# Altium PCB PCB1.PcbDoc
Units mil, origin at the board's own origin, x right, y up, seen from the top; angles counter-clockwise.
Board outline 3935 x 3930 mil, 2 copper layers (Top Layer, Bottom Layer); 150 components, 104 nets, 396 pads, 41 vias.
Unrouted connection lines stored in the file: 23.
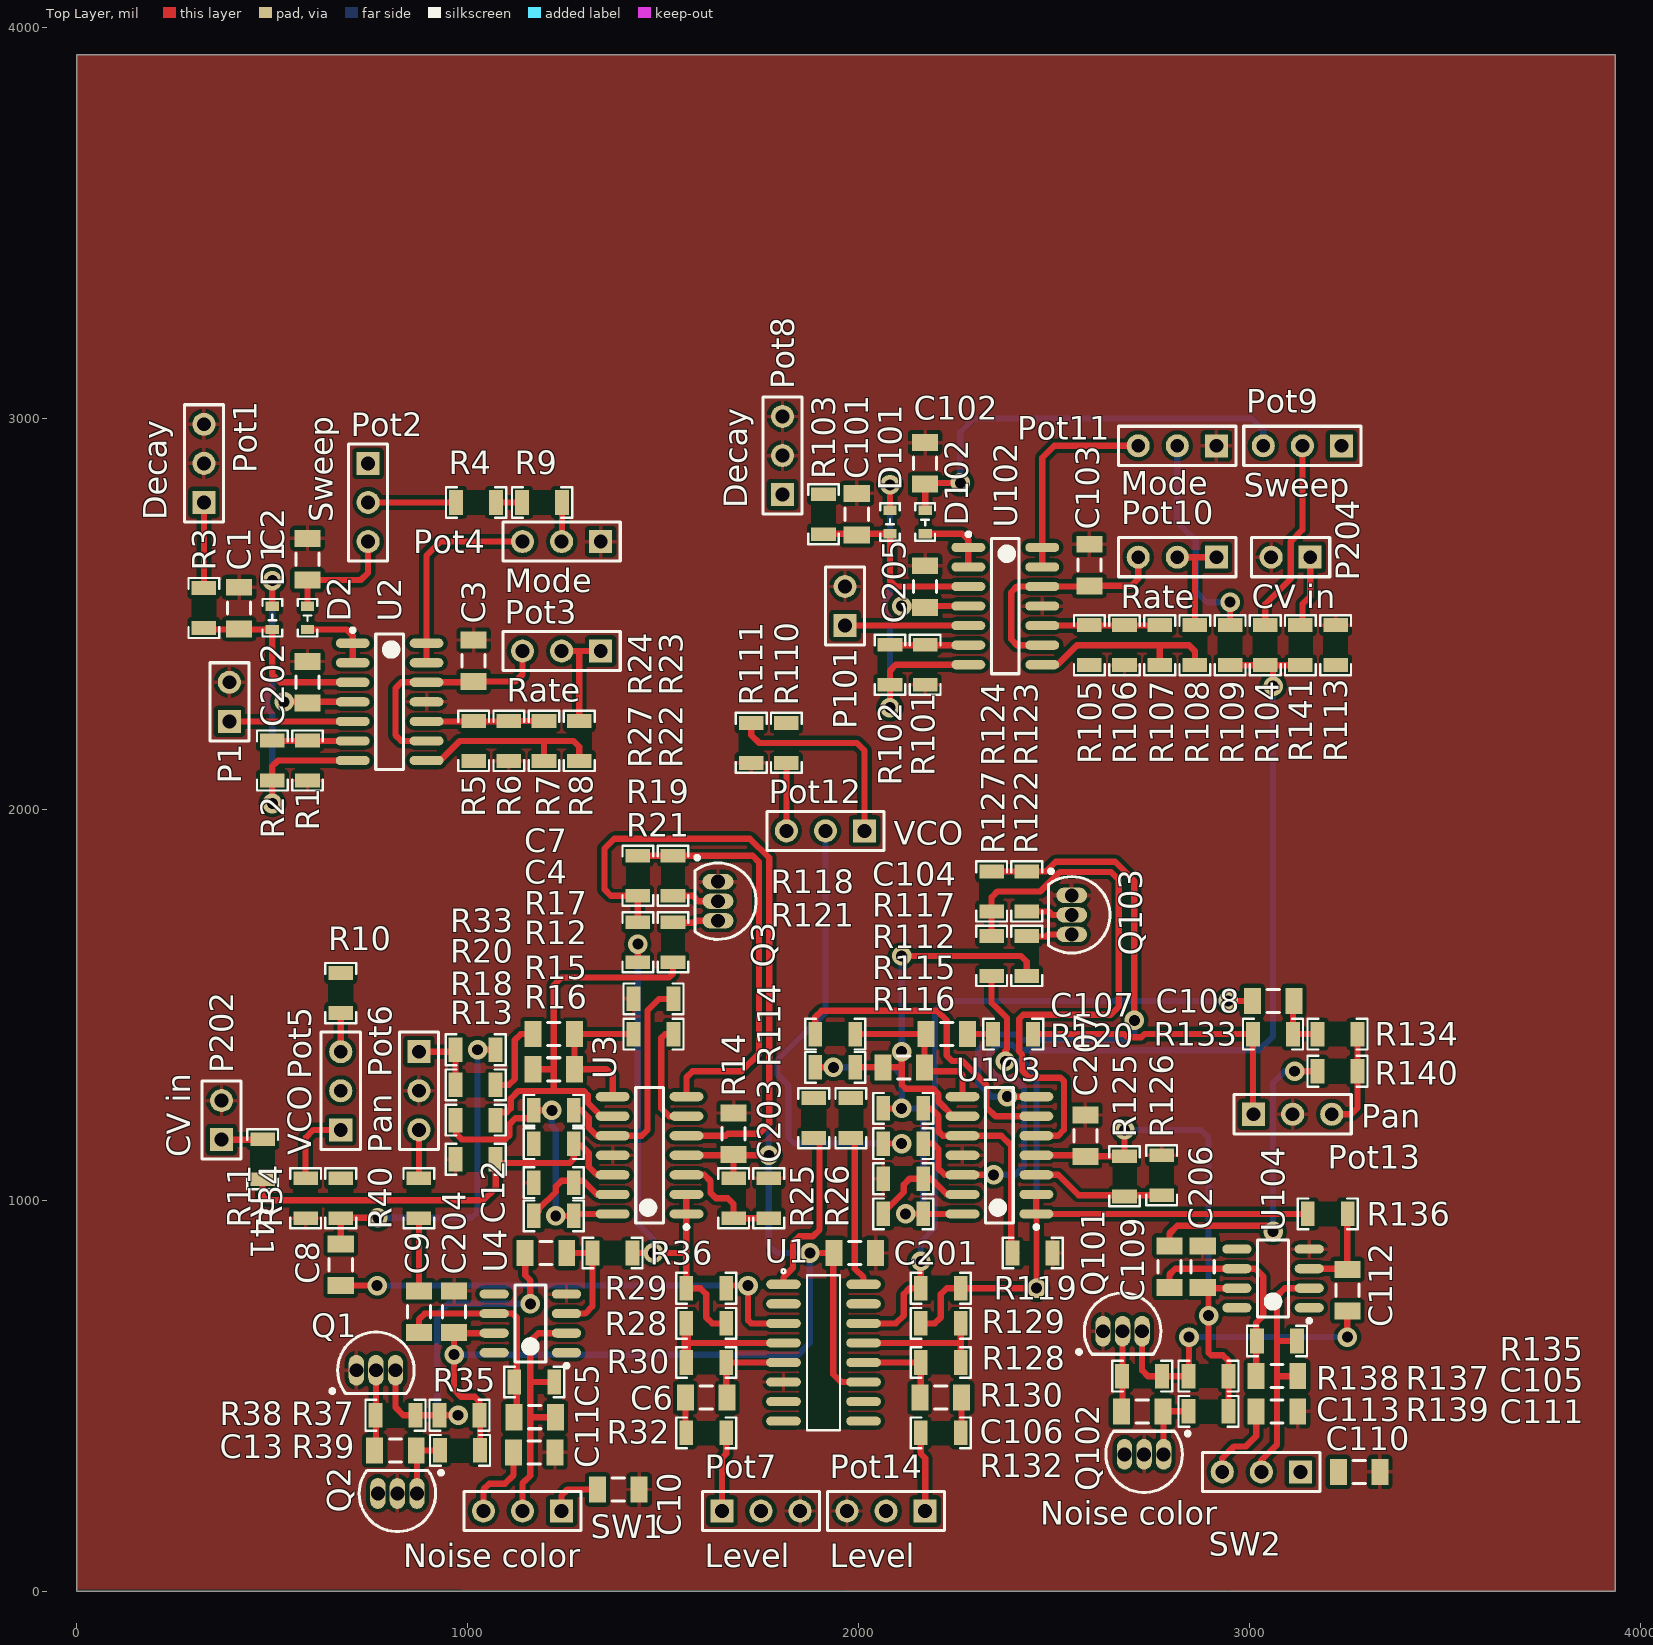
[diagram p0: Top Layer view]
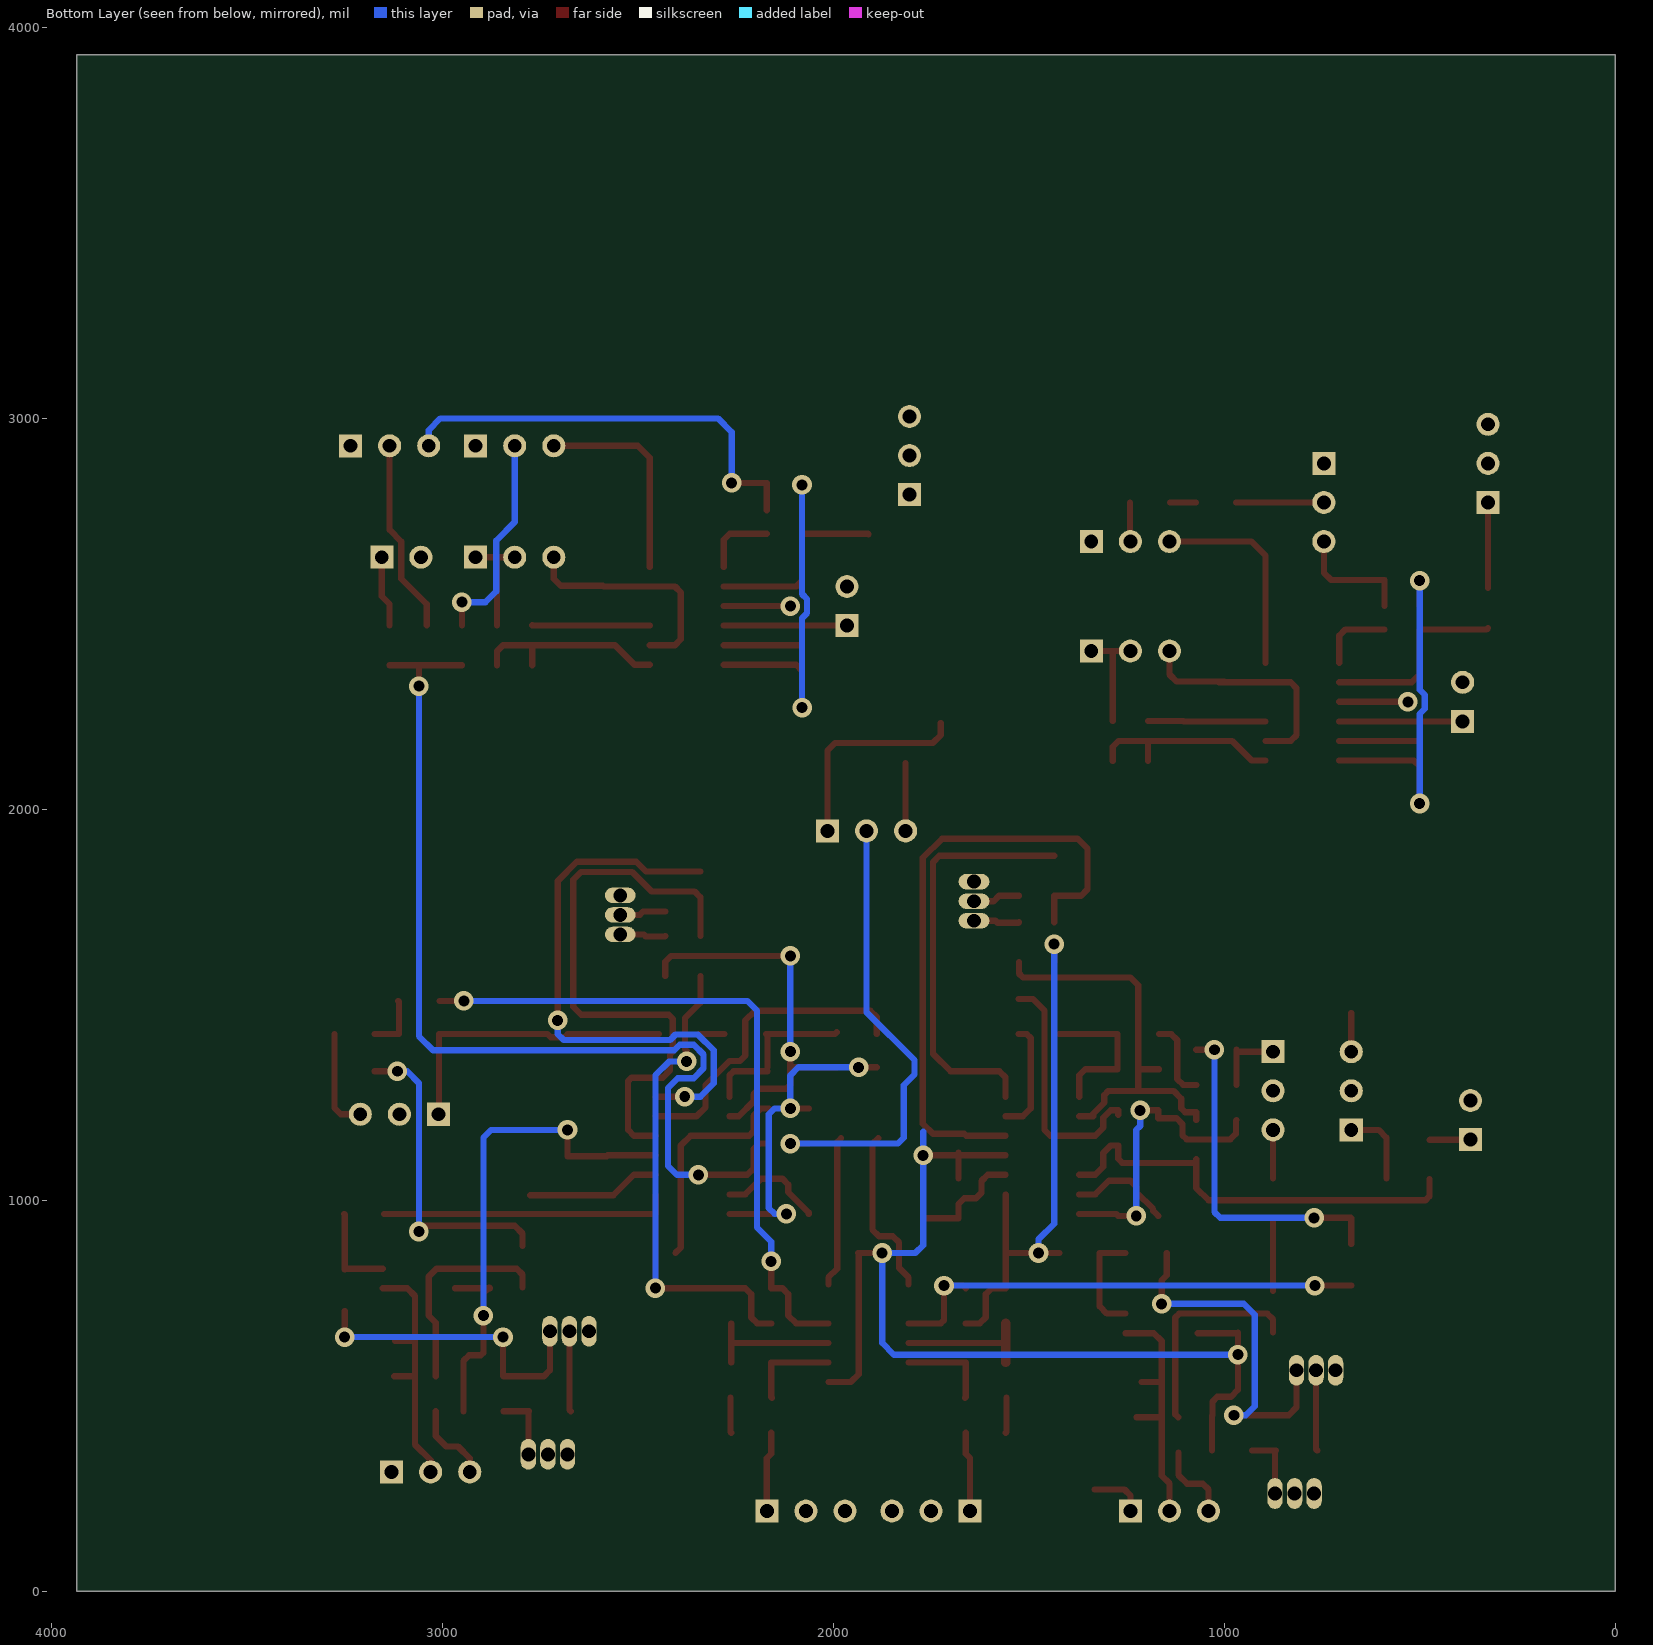
[diagram p1: Bottom Layer view, seen from below]
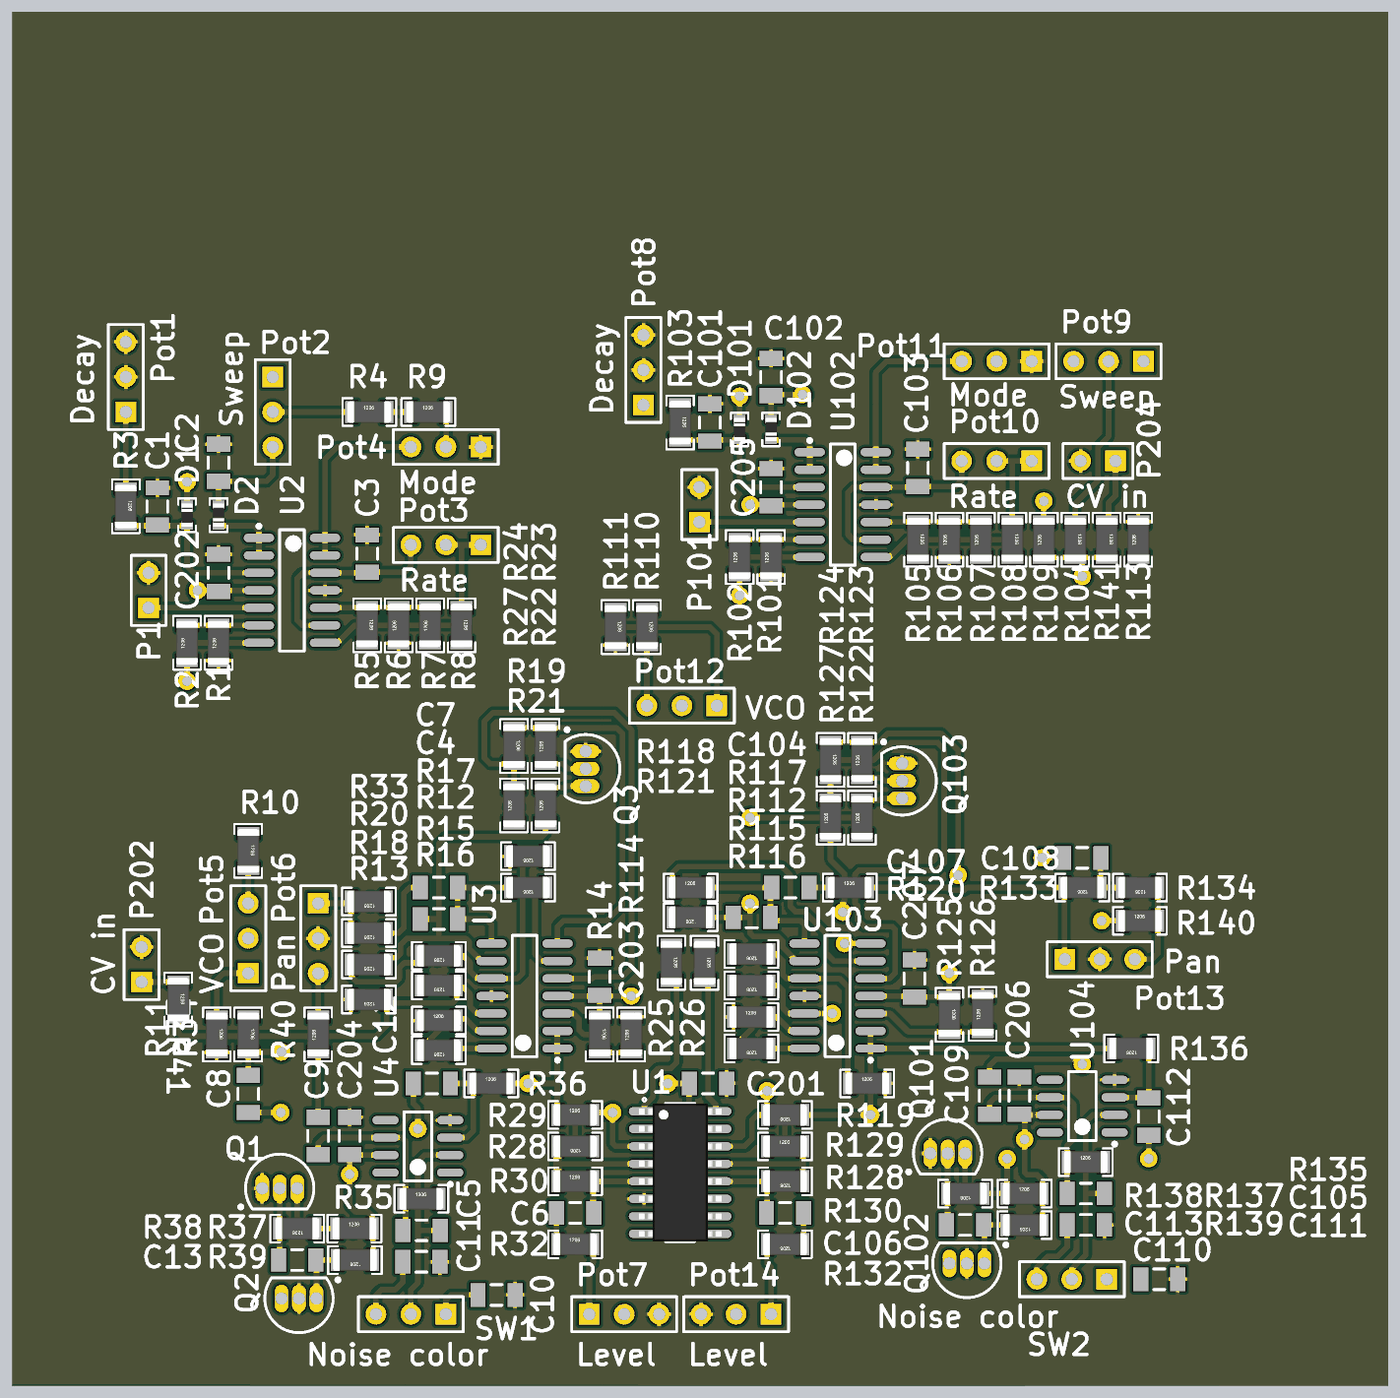
[diagram p2: 3D render of the assembled board from above, using the file's embedded part models]

## Layer stack, top to bottom
Top Solder: solder mask 0.4, Solder Resist, Dk 3.5
Top Layer: signal copper 1.4
Dielectric 1: dielectric 12.6, FR-4, Dk 4.8
Bottom Layer: signal copper 1.4
Bottom Solder: solder mask 0.4, Solder Resist, Dk 3.5

## Board outline
0,0 3935,0 3935,3930 0,3930

## Design rules (kind name [scope] priority, off if disabled: settings)
Clearance [All] p1: gap=10 ignorepadtopadclearanceinfootprint=FALSE except(0: Arc-Hole Track-Hole SMDPad-Hole THPad-Hole Via-Hole Fill-Hole Poly-Hole Region-Hole Text-Hole)
PolygonConnect [All] p1: connectstyle=Relief reliefconductorwidth=10 reliefentries=4 polygonreliefangle="90 Angle" airgapwidth=10
RoutingVias [All] p1: holewidth=28 width=50 viastyle="Through Hole" minholewidth=12 minwidth=28 maxholewidth=28 maxwidth=50
SolderMaskExpansion [All] p1: expansion=4
Width [All] p1: maxlimit=64 minlimit=10 preferedwidth=10
30 further rules are at their usual default settings.

## Classes and differential pairs
component class Sheet3: C201 C202 C203 C204 C205 C206 C207 P202 P204 Pot1 Pot2 Pot3 Pot4 Pot5 Pot6 Pot7 Pot8 Pot9 Pot10 Pot11 Pot12 Pot13 Pot14 SW1 SW2
component class Sheet2: C101 C102 C103 C104 C105 C106 C107 C108 C109 C110 C111 C112 C113 D101 D102 P101 Q101 Q102 Q103 R101 R102 R103 R104 R105 R106 R107 R108 R109 R110 R111 R112 R113 R114 R115 R116 R117 R118 R119 R120 R121 R122 R123 R124 R125 R126 R127 R128 R129 R130 R132 R133 R134 R135 R136 R137 R138 R139 R140 R141 U102 U103 U104
component class Sheet1: C1 C2 C3 C4 C5 C6 C7 C8 C9 C10 C11 C12 C13 D1 D2 P1 Q1 Q2 Q3 R1 R2 R3 R4 R5 R6 R7 R8 R9 R10 R11 R12 R13 R14 R15 R16 R17 R18 R19 R20 R21 R22 R23 R24 R25 R26 R27 R28 R29 R30 R32 R33 R34 R35 R36 R37 R38 R39 R40 R41 U1 U2 U3 U4

## Components (designator, comment, footprint, x,y, rotation, side; value= is the part's Value field where it differs from the comment)
C1 "Cap Pol1" C1206 415,2515 r90 top value="3.3 uF"
C2 "Cap Pol1" C1206 590,2640 r90 top value="3.3 uF"
C3 "Cap" C1206 1015,2380 r270 top value="47 nF"
C4 "Cap" C1206 1220,1335 r180 top value="1 nF"
C5 "Cap" C1206 1170.94,445 r0 top value="22 pF"
C6 "Cap Pol1" C1206 1610,495 r180 top value="1 uF"
C7 "Cap Pol1" C1206 1220,1425 r180 top value="1 uF"
C8 "Cap Pol1" C1206 675,835 r90 top value="1 uF"
C9 "Cap" C1206 875,715 r90 top value="47 nF"
C10 "Cap" C1206 1385,260 r0 top value="10 nF"
C11 "Cap" C1206 1170,355 r0 top value="4,7 nF"
C12 "Cap" C1206 1200,865 r180 top value="10 nF"
C13 "Cap" C1206 815,360 r180 top value="10 nF"
C101 "Cap Pol1" C1206 1995,2755 r90 top value="3.3 uF"
C102 "Cap Pol1" C1206 2170,2885 r90 top value="3.3 uF"
C103 "Cap" C1206 2590,2625 r270 top value="47 nF"
C104 "Cap" C1206 2115,1340 r180 top value="1 nF"
C105 "Cap" C1206 3070,550 r0 top value="22 pF"
C106 "Cap Pol1" C1206 2210,495 r0 top value="1 uF"
C107 "Cap Pol1" C1206 2225,1425 r0 top value="1 uF"
C108 "Cap Pol1" C1206 3060,1510 r0 top value="1 uF"
C109 "Cap" C1206 2795,830 r90 top value="47 nF"
C110 "Cap" C1206 3280,305 r0 top value="10 nF"
C111 "Cap" C1206 3070,460 r0 top value="4,7 nF"
C112 "Cap" C1206 3250,770 r270 top value="10 nF"
C113 "Cap" C1206 2725,460 r180 top value="10 nF"
C201 "Cap" C1206 1990,865 r0 top value="100 nF"
C202 "Cap" C1206 590,2325 r90 top value="100 nF"
C203 "Cap" C1206 1680,1170 r90 top value="100 nF"
C204 "Cap" C1206 965,715 r90 top value="100 nF"
C205 "Cap" C1206 2170,2570 r90 top value="100 nF"
C206 "Cap" C1206 2880,830 r90 top value="100 nF"
C207 "Cap" C1206 2580,1165 r90 top value="100 nF"
D1 "1N4148-0603" D0603 500,2490 r90 top
D2 "1N4148-0603" D0603 590,2490 r270 top
D101 "1N4148-0603" D0603 2080,2735 r90 top
D102 "1N4148-0603" D0603 2170,2735 r270 top
P1 "Header 2" HDR1X2 390,2225 r90 top
P101 "Header 2" HDR1X2 1965,2470 r90 top
P202 "CV in" HDR1X2 370,1155 r90 top
P204 "CV in" HDR1X2 3155,2645 r180 top
Pot1 "Decay" HDR1X3 325,2785 r90 top
Pot2 "Sweep" HDR1X3 745,2885 r270 top
Pot3 "Rate" HDR1X3 1340,2405 r180 top
Pot4 "Mode" HDR1X3 1340,2685 r180 top
Pot5 "VCO" HDR1X3 675,1180 r90 top
Pot6 "Pan" HDR1X3 875,1380 r270 top
Pot7 "Level" HDR1X3 1650,205 r0 top
Pot8 "Decay" HDR1X3 1805,2805 r90 top
Pot9 "Sweep" HDR1X3 3235,2930 r180 top
Pot10 "Rate" HDR1X3 2915,2645 r180 top
Pot11 "Mode" HDR1X3 2915,2930 r180 top
Pot12 "VCO" HDR1X3 2015,1945 r180 top
Pot13 "Pan" HDR1X3 3010,1220 r0 top
Pot14 "Level" HDR1X3 2170,205 r180 top
Q1 "2N3904" TO-92A 765,565 r270 top
Q2 "2N3904" TO-92A 820,250 r90 top
Q3 "2N3904" TO-92A 1640,1765 r180 top
Q101 "2N3904" TO-92A 2675,665 r270 top
Q102 "2N3904" TO-92A 2730,350 r90 top
Q103 "2N3904" TO-92A 2545,1730 r180 top
R1 "Res2" R1206 590,2125 r90 top value=1K
R2 "Res2" R1206 500,2125 r90 top value=1K
R3 "Res2" R1206 325,2515 r270 top value=1K
R4 "Res2" R1206 1021.18,2785 r0 top value=1K
R5 "Res2" R1206 1015,2175 r270 top value=1K
R6 "Res2" R1206 1105,2175 r90 top value=1K
R7 "Res2" R1206 1195,2175 r90 top value=1K
R8 "Res2" R1206 1285,2175 r270 top value=1K
R9 "Res2" R1206 1190,2785 r0 top value=1K
R10 "Res2" R1206 675,1530 r270 top value=1K
R11 "Res2" R1206 585,1005 r270 top value=1K
R12 "Res2" R1206 1220,1145 r180 top value=1K
R13 "Res2" R1206 1020,1105 r180 top value=1K
R14 "Res2" R1206 1885,1210 r270 top value=1K
R15 "Res2" R1206 1220,1045 r0 top value=1K
R16 "Res2" R1206 1220,960 r180 top value=1K
R17 "Res2" R1206 1220,1230 r180 top value=1K
R18 "Res2" R1206 1020,1205 r180 top value=1K
R19 "Res2" R1206 1475,1515 r180 top value=1K
R20 "Res2" R1206 1020,1295 r180 top value=1K
R21 "Res2" R1206 1475,1425 r180 top value=1K
R22 "Res2" R1206 1525,1660 r90 top value=1K
R23 "Res2" R1206 1525,1830 r90 top value=1K
R24 "Res2" R1206 1435,1830 r270 top value=1K
R25 "Res2" R1206 1680,1005 r270 top value=1K
R26 "Res2" R1206 1770,1005 r90 top value=1K
R27 "Res2" R1206 1435,1660 r90 top value=1K
R28 "Res2" R1206 1610,685 r180 top value=1K
R29 "Res2" R1206 1610,775 r0 top value=1K
R30 "Res2" R1206 1610,585 r0 top value=1K
R32 "Res2" R1206 1610,405 r0 top value=1K
R33 "Res2" R1206 1020,1385 r180 top value=1K
R34 "Res2" R1206 675,1005 r270 top value=1K
R35 "Res2" R1206 1170,535 r0 top value=1K
R36 "Res2" R1206 1370,865 r0 top value=1K
R37 "Res2" R1206 978.82,450 r0 top value=1K
R38 "Res2" R1206 815,450 r180 top value=1K
R39 "Res2" R1206 980,360 r180 top value=1K
R40 "Res2" R1206 875,1005 r90 top value=1K
R41 "Res2" R1206 475,1105 r270 top value=1K
R101 "Res2" R1206 2170,2370 r90 top value=1K
R102 "Res2" R1206 2080,2370 r90 top value=1K
R103 "Res2" R1206 1910,2755 r270 top value=1K
R104 "Res2" R1206 3040,2420 r270 top value=1K
R105 "Res2" R1206 2590,2420 r270 top value=1K
R106 "Res2" R1206 2680,2420 r90 top value=1K
R107 "Res2" R1206 2770,2420 r90 top value=1K
R108 "Res2" R1206 2860,2420 r270 top value=1K
R109 "Res2" R1206 2950,2420 r90 top value=1K
R110 "Res2" R1206 1815,2170 r270 top value=1K
R111 "Res2" R1206 1725,2170 r270 top value=1K
R112 "Res2" R1206 2113.82,1145 r180 top value=1K
R113 "Res2" R1206 3220,2420 r90 top value=1K
R114 "Res2" R1206 1980,1210 r270 top value=1K
R115 "Res2" R1206 2113.82,1055 r0 top value=1K
R116 "Res2" R1206 2113.82,965 r180 top value=1K
R117 "Res2" R1206 2113.82,1235 r180 top value=1K
R118 "Res2" R1206 1940,1340 r180 top value=1K
R119 "Res2" R1206 2445,865 r0 top value=1K
R120 "Res2" R1206 2395,1425 r0 top value=1K
R121 "Res2" R1206 1940,1425 r0 top value=1K
R122 "Res2" R1206 2430,1625 r90 top value=1K
R123 "Res2" R1206 2430,1790 r90 top value=1K
R124 "Res2" R1206 2340,1790 r270 top value=1K
R125 "Res2" R1206 2680,1061.18 r270 top value=1K
R126 "Res2" R1206 2775,1063.82 r90 top value=1K
R127 "Res2" R1206 2340,1625 r90 top value=1K
R128 "Res2" R1206 2210,685 r0 top value=1K
R129 "Res2" R1206 2210,775 r180 top value=1K
R130 "Res2" R1206 2210,585 r180 top value=1K
R132 "Res2" R1206 2210,405 r180 top value=1K
R133 "Res2" R1206 3060,1425 r180 top value=1K
R134 "Res2" R1206 3225,1425 r180 top value=1K
R135 "Res2" R1206 3070,640 r0 top value=1K
R136 "Res2" R1206 3200,965 r180 top value=1K
R137 "Res2" R1206 2895,550 r0 top value=1K
R138 "Res2" R1206 2725,550 r180 top value=1K
R139 "Res2" R1206 2895,460 r180 top value=1K
R140 "Res2" R1206 3225,1330 r0 top value=1K
R141 "Res2" R1206 3130,2420 r270 top value=1K
SW1 "Noise color" HDR1X3 1240,205 r180 top
SW2 "Noise color" HDR1X3 3130,305 r180 top
U1 "LM13700" SOIC16 1910,610 r0 top
U2 "LM324AD" D014_N 800,2275 r0 top
U3 "LM324AD" D014_N 1465,1115 r180 top
U4 "LM307D" D008_L 1160,685 r180 top
U102 "LM324AD" D014_N 2375,2520 r0 top
U103 "LM324AD" D014_N 2360,1115 r180 top
U104 "LM307D" D008_L 3060,800 r180 top

## Footprints (in the part's own frame and the unit in brackets; to place one, negate y for a bottom-side part, rotate by r counter-clockwise, add the part's x,y. Pads: shape width x height; smd on the part's side, far side on the other; paste and mask are expansions set on the pad)
C1206 [mm] "Chip Capacitor, Body 3.2x1.6mm, IPC High Density"
  rect 1.1x1.7 smd: 1(-1.35,0) 2(1.35,0)
  silkscreen extent -0.4,-0.75 0.4,0.75, body extent -1.7,-0.9 1.7,0.9, height 1.3
D008_L [mm] "SOIC, 8-Leads, Body 4.9x3.9mm, Pitch 1.27mm, IPC High Density"
  oval 1.9x0.6 smd: 1(-2.35,1.905) 2(-2.35,0.635) 3(-2.35,-0.635) 4(-2.35,-1.905) 5(2.35,-1.905) 6(2.35,-0.635) 7(2.35,0.635) 8(2.35,1.905)
  silkscreen extent -2.48,-2.5 1,2.88, body extent -2,-2.5 2,2.5, height 1.75
D014_N [mm] "SOIC, 14-Leads, Body 8.7x3.9mm, Pitch 1.27mm, IPC Medium Density"
  oval 2.2x0.6 smd: 1(-2.4,3.81) 2(-2.4,2.54) 3(-2.4,1.27) 4(-2.4,0) 5(-2.4,-1.27) 6(-2.4,-2.54) 7(-2.4,-3.81) 8(2.4,-3.81) 9(2.4,-2.54) 10(2.4,-1.27) 11(2.4,0) 12(2.4,1.27) 13(2.4,2.54) 14(2.4,3.81)
  silkscreen extent -2.52,-4.4 0.9,4.78, body extent -2,-4.38 2,4.38, height 1.75
D0603 [mil]
  rect 24x34 smd: 1(-30.01,0) 2(29.99,0)
  Top Layer pour cut-out: -18.01,17 17.99,17 17.99,-17 -18.01,-17
  silkscreen extent -48,-25 48,25, body extent -33,-16 33,16, height 22
HDR1X2 [mm] "Connector; Header; 2 Position"
  rect 1.5x1.5 hole 0.9: 1(0,0)
  round 1.5 hole 0.9: 2(2.54,0)
  silkscreen extent -1.27,-1.27 3.81,1.27
HDR1X3 [mm] "Connector; Header; 3 Position"
  rect 1.5x1.5 hole 0.9: 1(0,0)
  round 1.5 hole 0.9: 2(2.54,0) 3(5.08,0)
  silkscreen extent -1.27,-1.27 6.35,1.27
R1206 [mm] "Chip Resistor, 2-Leads, Body 2,0x1,3mm, IPC Medium Density"
  rect 0.9x1.6 smd: 1(-1.3,0) 2(1.3,0)
  Top Layer pour cut-out: -0.85,0.8 -0.85,-0.8 0.85,-0.8 0.85,0.8
  silkscreen extent -1.95,-1 1.95,1, body extent -1.6,-0.8 1.6,0.8, height 1
SOIC16 [mm] "SOIC, 16-Leads, Body 5,0x4,0mm (max), Pitch 1,27mm, IPC Medium Density"
  oval 2.25x0.6 smd: 1(-2.6,4.445) 2(-2.6,3.175) 3(-2.6,1.905) 4(-2.6,0.635) 5(-2.6,-0.635) 6(-2.6,-1.905) 7(-2.6,-3.175) 8(-2.6,-4.445) 9(2.6,-4.445) 10(2.6,-3.175) 11(2.6,-1.905) 12(2.6,-0.635) 13(2.6,0.635) 14(2.6,1.905) 15(2.6,3.175) 16(2.6,4.445)
  Top Layer pour cut-out: -1.475,4.84 -1.475,-4.96 1.475,-4.96 1.475,4.84
  silkscreen extent -2.72,-5.03 1.07,5.42, body extent -3,-5 3,5, height 1.75
TO-92A [mm] "TO, Flat Index; 3 In-Line, Axial Leads; Body Dia. 4.5mm; Leads 0.51 x 0.48 mm (max)"
  oval 2x1 hole 0.9: 1(0,-1.27) 2(0,0) 3(0,1.27)
  silkscreen extent -2.48,-2.95 1.5,2.48, body extent -2.48,-2.5 1.5,2.5, height 6.86

## Part data
C1 C2 C6 C7 C8 C101 C102 C106 C107 C108: "Polarized Capacitor (Radial)", LatestRevisionDate=17-Jul-2002, LatestRevisionNote="Re-released for DXP Platform.", PackageDescription="Polarized Capacitor (Radial); 2 Leads", PackageReference=RB7.6-15, Published=8-Jun-2000, Publisher="Altium Limited"
C3 C4 C5 C9 C10 C11 C12 C13 C103 C104 C105 C109 C110 C111 C112 C113 C201 C202 C203 C204 C205 C206 C207: "Capacitor", LatestRevisionDate=17-Jul-2002, LatestRevisionNote="Re-released for DXP Platform.", PackageDescription="Radial Cap, Thru-Hole; 2 Leads; 0.3 in Pin Spacing", PackageReference=RAD-0.3, Published=8-Jun-2000, Publisher="Altium Limited"
D1 D2 D101 D102: library part 1N4148, "Dioda: przełączająca; SMD; 100V; 150mA; 4ns; 0603", Manufacture="DC COMPONENTS", Value1=75V, Value2=150mA, Assembly=SMD, ComponentLink1Description=Datasheet, ComponentLink1URL=http://www.tme.eu/pl/Document/56f18f971963fb7c3e40973a6fd3d82c/CD4148W_WT.pdf, ComponentSymbol=1N4148-0603, ComponentType="Diod Rectifier", DafaultFootprint=0603, Parameter1=Vr, Parameter2=If, Shop1=TME
P1 P101: "Header, 2-Pin", LatestRevisionDate=17-Jul-2002, LatestRevisionNote="Re-released for DXP Platform.", Publisher="Altium Limited"
P202 P204: library part "Header 2", "Header, 2-Pin", LatestRevisionDate=17-Jul-2002, LatestRevisionNote="Re-released for DXP Platform.", Publisher="Altium Limited"
Pot1 Pot2 Pot3 Pot4 Pot5 Pot6 Pot7 Pot8 Pot9 Pot10 Pot11 Pot12 Pot13 Pot14 SW1 SW2: library part "Header 3", "Header, 3-Pin", LatestRevisionDate=17-Jul-2002, LatestRevisionNote="Re-released for DXP Platform.", Publisher="Altium Limited"
Q1 Q2 Q3 Q101 Q102 Q103: "NPN General Purpose Amplifier", ComponentLink1Description="Manufacturer Link", ComponentLink1URL=http://www.fairchildsemi.com/, ComponentLink2Description=Datasheet, ComponentLink2URL=http://www.fairchildsemi.com/ds/2N%2F2N3904.pdf, DatasheetVersion=1997, LatestRevisionDate=15-Jan-2003, LatestRevisionNote="PCB Footprint 'BCY-W3/D4.7' replaced", PackageDescription="TO, Flat Index; 3 In-Line, Axial Leads; Body Dia. 4.5mm; Leads 0.51 x 0.48 mm (max)", PackageReference=TO-92A, PackageVersion=Sep-1998, Published=8-Jun-2000, Publisher="Altium Limited"
R1 R2 R3 R4 R5 R6 R7 R8 R9 R10 R11 R12 R13 R14 R15 R16 R17 R18 R19 R20 R21 R22 R23 R24 R25 R26 R27 R28 R29 R30 R32 R33 R34 R35 R36 R37 R38 R39 R40 R41 R101 R102 R103 R104 R105 R106 R107 R108 R109 R110 R111 R112 R113 R114 R115 R116 R117 R118 R119 R120 R121 R122 R123 R124 R125 R126 R127 R128 R129 R130 R132 R133 R134 R135 R136 R137 R138 R139 R140 R141: "Resistor", LatestRevisionDate=17-Jul-2002, LatestRevisionNote="Re-released for DXP Platform.", PackageDescription="Axial Device, Thru-Hole; 2 Leads; 0.4 in Pin Spacing", PackageReference=AXIAL-0.4, Published=8-Jun-2000, Publisher="Altium Limited"
U2 U3 U102 U103: "Quadruple Operational Amplifier", Code_IPC=SOIC127P600-14, ComponentLink1Description="Manufacturer Link", ComponentLink1URL=http://www.ti.com/, ComponentLink2Description=Datasheet, ComponentLink2URL=http://www-s.ti.com/sc/ds/lm324.pdf, DatasheetVersion=Jan-1989, LatestRevisionDate=13-Apr-2006, LatestRevisionNote="IPC-7351 Footprint Added.", PackageDescription="14-Pin Small Outline Integrated Circuit 1.27 mm Pitch", PackageReference=D014, PackageVersion=Jan-1998, Published=15-Apr-2002, Publisher="Altium Limited"
U4 U104: "High-Performance Operational Amplifier", Code_IPC=SOIC127P600-8, ComponentLink1Description="Manufacturer Link", ComponentLink1URL=http://www.ti.com/, ComponentLink2Description=Datasheet, ComponentLink2URL=http://www-s.ti.com/sc/ds/lm307.pdf, DatasheetVersion=Jun-1988, LatestRevisionDate=13-Apr-2006, LatestRevisionNote="IPC-7351 Footprint Added.", PackageDescription="8-Pin Small Outline Integrated Circuit 1.27 mm Pitch", PackageReference=D008, PackageVersion=Jan-1998, Published=15-Apr-2002, Publisher="Altium Limited"

## Via types
v1: diameter 50, hole 28, Top Layer to Bottom Layer, 41 vias

## Nets (pads, with @x,y where several pads share a name; then routed paths per layer and width w, separated by ;. In a path a pad name is that pad's centre, name@x,y a point inside that pad or via, vN(x,y) a via of type N, cw(c..) or ccw(c..) an arc to the next point about the centre after c; other vN are vias at no path point)
GND: C1.2 C2.2 C3.1 C10.2 C11.2 C101.2 C102.2 C103.1 C110.2 C111.2 C201.2 C202.2 C203.2 C204.2 C205.2 C206.2 C207.2 P1.2 P101.2 P202.2 P204.2 Pot1.2 Pot1.3 Pot4.1 Pot6.2 Pot7.3 Pot8.2 Pot8.3 Pot11.1 Pot13.2 Pot14.3 Q1.1 Q2.2 Q3.1 Q101.1 Q102.2 Q103.1 R1.1 R6.1 R11.2 R13.2 R15.1 R19.2 R26.2 R101.1 R106.1 R111.2 R113.2 R115.1 R119.2 R126.2 U1.6 U2.11 U3.11 U4.4 U102.11 U103.11 U104.4
NetC1_1: C1.1 D1.1 R3.2 U2.3 | length 505.4
  Top Layer w16: R3.2 328.83,2459.99 D1.1 500,2449.99 500,2345 520,2325 U2.3
NetC2_1: C2.1 D2.1 Pot2.3 R14.1 | length 309.4
  Top Layer w16: D2.1 590,2586.85 726.85,2586.85 745,2605 Pot2.3
NetC3_2: C3.2 Pot3.3 U2.9 U2.12 | length 620.2
  Top Layer w16: U2.9 830,2175 815,2190 815,2310 830,2325 U2.12 1013.15,2325 C3.2 ; C3.2@1000,2326.85 1121.85,2326.85 1140,2345 Pot3.3
NetC4_1: C4.1 C7.1 R21.2 U3.8 | length 398.9
  Top Layer w16: U3.8 1370.51,1319.49 1355,1335 C4.1 C7.1 R21.2
NetC4_2: C4.2 R18.1 R22.1 U3.9 | length 1068.9
  Top Layer w16: R18.1 1071.18,1225 1100,1225 1110,1235 1110,1260 1129.5,1279.5 1220.5,1279.5 1220,1280 1220,1335 ; C4.2 1220,1335 ; 1220,1279.5 1296.35,1279.5 1306.9,1268.95 1306.9,1249.87 1335.2,1221.56 1335.2,1215 U3.9 ; R22.1 1525,1580 1515,1570 1240,1570 1220,1550 1220,1335
NetC5_1: C5.1 C9.1 R35.1 U4.6 | length 551.5
  Top Layer w16: C9.1 875,695 890,710 U4.6 1115,710 1125,700 1125,452.21 C5.1
NetC5_2: C5.2 R35.2 SW1.2 U4.2 | length 659.4
  Top Layer w16: SW1.2 1140,275.49 1160,295.49 1160,445 ; R35.2@1211.18,535 1160,535 ; C5.2 1160,445 ; U4.2 1180,660 1160,640 1160,535 ; 1160,445 1160,535
NetC6_1: C6.1 R30.2 U1.5 | length 237.3
  Top Layer w16: C6.1 1661.18,496.97 R30.2 U1.5
NetC6_2: C6.2 R32.1 | length 90.8
  Top Layer w16: C6.2 1556.85,406.97 R32.1
NetC7_2: C7.2 R20.1 | length 208.1
  Top Layer w16: R20.1 1105,1295 1120,1310 1120,1410 1135,1425 C7.2
NetC8_1: C8.1 R29.2 U1.3 | length 1281.4
  Top Layer w16: C8.1 v1(768.15,781.85) ; R29.2 1668.03,781.85 v1@1715,781.85 ; v1(1716.85,781.85) 1716.85,693.15 1725,685 U1.3
  Bottom Layer w16: v1(768.15,781.85) v1(1716.85,781.85)
NetC8_2: C8.2 R33.1 R34.2 | length 883.6
  Top Layer w16: C8.2 R34.2 676.18,955 v1(770,955) ; v1(1025,1385) R33.1
  Bottom Layer w16: v1(770,955) 1010,955 1025,970 v1(1025,1385)
NetC9_2: C9.2 R40.1 | length 185.7
  Top Layer w16: C9.2 R40.1
NetC10_1: C10.1 SW1.1 | length 138.1
  Top Layer w16: SW1.1 1240,245 1255,260 C10.1
NetC11_1: C11.1 SW1.3 | length 205.3
  Top Layer w16: SW1.3 1040,260 1055,275 1095,275 1116.85,296.85 C11.1
NetC12_1: C12.1 R36.1 U4.3 | length 275.9
  Top Layer w16: U4.3 1300,710 1318.82,728.82 R36.1 C12.1
NetC12_2: C12.2 Q1.3 R37.1 R38.1 | length 944.9
  Top Layer w16: Q1.3 815,470 835,450 R38.1 R37.1 v1(975,450) ; C12.2 1146.85,808.15 1160,795 v1(1160,735)
  Bottom Layer w16: v1(975,450) 945,450 922,473 922,707 950,735 v1(1160,735)
NetC13_1: C13.1 Q2.1 R39.2 | length 171.4
  Top Layer w16: Q2.1 870,358.15 C13.1 R39.2
NetC13_2: C13.2 Q1.2 R38.2 | length 206.3
  Top Layer w16: C13.2 765,363.15 Q1.2
NetC101_1: C101.1 D101.1 R103.2 U102.3 | length 497.2
  Top Layer w16: R103.2 1911.17,2704.99 D101.1 2080,2585 2095,2570 U102.3
NetC102_1: C102.1 D102.1 Pot9.3 R114.1 | length 1131.9
  Top Layer w16: D102.1 2170,2835 v1(2260,2835)
  Bottom Layer w16: v1(2260,2835) 2260,2965 2295,3000 3005,3000 3035,2970 Pot9.3
NetC103_2: C103.2 Pot10.3 U102.9 U102.12 | length 600.2
  Top Layer w16: U102.9 2405,2420 2390,2435 2390,2555 2405,2570 U102.12 2588.15,2570 C103.2 2696.85,2571.85 2715,2590 Pot10.3
NetC104_1: C104.1 C107.1 R121.2 U103.8 | length 423.9
  Top Layer w16: R121.2@1991.18,1430 1996.18,1425 C107.1@2168.15,1425 ; C104.1@2168.15,1330 2255,1330 2265.51,1319.49 U103.8 ; C104.1 C107.1@2168.15,1425 ; C107.1 C107.1@2168.15,1425
NetC104_2: C104.2 R118.1 R122.1 U103.9 | length 1010.5
  Top Layer w16: R118.1 C104.2 2110,1340 ; v1(2110,1380) 2110,1340 ; v1(2110,1625) 2415,1625 2430,1610 R122.1 ; U103.9 2241.86,1215 2204.2,1252.65 2204.2,1270.8 2190,1285 2120,1285 2110,1295 2110,1340
  Bottom Layer w16: v1(2110,1380) v1(2110,1625)
NetC105_1: C105.1 C109.1 R135.1 U104.6 | length 550.2
  Top Layer w16: C109.1 2795,810 2810,825 U104.6 3015,825 3035,805 3035,705 3016.85,686.85 C105.1
NetC105_2: C105.2 R135.2 SW2.2 U104.2 | length 663.8
  Top Layer w16: SW2.2 3030,335 3070,375 3070,550 ; R135.2 3075,640 3070,645 ; C105.2 3070,550 ; U104.2 3090,775 3070,755 3070,645 ; 3070,550 3070,645
NetC106_1: C106.1 R130.2 U1.12 | length 237.3
  Top Layer w16: U1.12 R130.2 2158.82,496.97 C106.1
NetC106_2: C106.2 R132.1 | length 90.8
  Top Layer w16: R132.1 2263.15,406.97 C106.2
NetC107_2: C107.2 R120.1 | length 65.7
  Top Layer w16: C107.2 R120.1
NetC108_1: C108.1 R129.2 U1.14 | length 1763.1
  Top Layer w16: U1.14 2095,685 2115,705 2115,760 2130,775 R129.2 v1(2158.82,843.82) ; v1(2945,1510) C108.1
  Bottom Layer w16: v1(2158.82,843.82) 2158.82,893.82 2195,930 2195,1485 2220,1510 v1(2945,1510)
NetC108_2: C108.2 R133.1 R134.2 | length 148.5
  Top Layer w16: C108.2 3111.18,1508.03 R133.1 R134.2
NetC109_2: C109.2 R140.1 | length 817.6
  Top Layer w16: C109.2 2795,915 2815,935 3045,935 v1(3060,920) ; v1(3115,1330) R140.1
  Bottom Layer w16: v1(3060,920) 3060,1300 3090,1330 v1(3115,1330)
NetC110_1: C110.1 SW2.1
NetC111_1: C111.1 SW2.3 | length 208.5
  Top Layer w16: SW2.3 2930,340 2960,370 2990,370 3016.85,396.85 C111.1
NetC112_1: C112.1 R136.1 U104.3 | length 240.6
  Top Layer w16: U104.3 3248.15,825 C112.1 3250,963.82 R136.1
NetC112_2: C112.2 Q101.3 R137.1 R138.1 | length 797.4
  Top Layer w16: Q101.3 2725,565 2740,550 R138.1 R137.1 2845,551.18 v1(2845,650) ; v1(3250,650) C112.2
  Bottom Layer w16: v1(2845,650) v1(3250,650)
NetC113_1: C113.1 Q102.1 R139.2 | length 176.4
  Top Layer w16: Q102.1 2780,458.15 C113.1 R139.2
NetC113_2: C113.2 Q101.2 R138.2 | length 206.3
  Top Layer w16: C113.2 2675,463.15 Q101.2
NetD1_2: D1.2 R2.1 U2.7 | length 956.6
  Top Layer w16: v1(500,2015) R2.1 500,2110 515,2125 U2.7 ; D1.2 v1(500,2585)
  Bottom Layer w16: v1(500,2015) 500,2244.19 487,2257.19 487,2292.81 500,2305.81 500,2574.99 v1@510,2585
NetD2_2: D2.2 U2.1 U2.2 | length 191.4
  Top Layer w16: D2.2 689.99,2460.01 705.51,2444.49 U2.1 U2.2
NetD101_2: D101.2 R102.1 U102.7 | length 977.5
  Top Layer w16: v1@2080,2250 R102.1 2080,2355 2095,2370 U102.7 ; D101.2 v1@2080,2835
  Bottom Layer w16: v1@2080,2250 2080,2489.19 2067,2502.19 2067,2537.81 2080,2550.81 v1@2080,2835
  other v1: 2080,2260 2080,2830
NetD102_2: D102.2 U102.1 U102.2 | length 186.4
  Top Layer w16: D102.2 2264.99,2705.01 2280.51,2689.49 U102.1 U102.2
NetP1_1: P1.1 U2.5 | length 315.5
  Top Layer w16: P1.1 U2.5
NetP101_1: P101.1 U102.5 | length 315.5
  Top Layer w16: P101.1 U102.5
NetP202_1: P202.1 R41.1 | length 105.5
  Top Layer w16: P202.1 473.82,1155 R41.1@475,1153.82
NetP204_1: P204.1 R141.1 | length 182.1
  Top Layer w16: R141.1@3135,2471.18 3135,2525 3155,2545 P204.1
NetPot1_1: Pot1.1 R3.1 | length 218.8
  Top Layer w16: R3.1 Pot1.1
NetPot2_2: Pot2.2 R4.1 | length 225
  Top Layer w16: Pot2.2 R4.1
NetPot3_1: Pot3.1 Pot3.2 R8.1 | length 278.8
  Top Layer w16: Pot3.2 1285,2405 ; R8.1 1285,2405 ; Pot3.1 1285,2405
NetPot4_2: Pot4.2 R9.2 | length 100.5
  Top Layer w16: Pot4.2 1241.18,2686.18 R9.2
NetPot4_3: Pot4.3 U2.13 U2.14 | length 534.7
  Top Layer w16: U2.13 U2.14 894.49,2649.49 930,2685 Pot4.3
NetPot5_1: Pot5.1 R11.1 | length 202.1
  Top Layer w16: R11.1 585,1160 605,1180 Pot5.1
NetPot5_2: Pot5.2 R12.2
NetPot5_3: Pot5.3 R10.2 | length 98.8
  Top Layer w16: Pot5.3 R10.2
NetPot6_1: Pot6.1 R20.2 R33.2 | length 185.9
  Top Layer w16: Pot6.1 963.82,1380 R33.2 R20.2
NetPot6_3: Pot6.3 R34.1 R40.2 | length 118.8
  Top Layer w16: R40.2 Pot6.3@875,1175
NetPot7_1: Pot7.1 R32.2 | length 204.6
  Top Layer w16: Pot7.1 1650,340 1661.18,351.18 R32.2
NetPot8_1: Pot8.1 R103.1
NetPot9_2: Pot9.2 R104.1 | length 498.2
  Top Layer w16: R104.1 3040,2525 3105,2590 3105,2685 3135,2715 Pot9.2
NetPot10_1: Pot10.1 Pot10.2 R108.1 | length 273.8
  Top Layer w16: Pot10.2 2860,2645 ; R108.1 2860,2645 ; Pot10.1 2860,2645
NetPot11_2: Pot11.2 R109.2 | length 549.9
  Top Layer w16: R109.2 v1(2950,2530)
  Bottom Layer w16: Pot11.2 2815,2735 2862.53,2687.47 2862.53,2557.47 2890,2530 v1(2950,2530)
NetPot11_3: Pot11.3 U102.13 U102.14 | length 537.6
  Top Layer w16: U102.13 U102.14 2469.49,2899.49 2500,2930 Pot11.3
NetPot12_1: Pot12.1 R111.1 | length 542.7
  Top Layer w16: R111.1 1725,2190 1745,2170 1995,2170 2015,2150 Pot12.1
NetPot12_2: Pot12.2 R112.2 | length 1191.1
  Top Layer w16: R112.2 v1(2110,1145)
  Bottom Layer w16: Pot12.2 1915,1480.81 1792,1357.81 1792,1322.19 1820,1294.19 1820,1160 1835,1145 v1(2110,1145)
NetPot12_3: Pot12.3 R110.2 | length 173.8
  Top Layer w16: Pot12.3 R110.2
NetPot13_1: Pot13.1 R120.2 R133.2 | length 774.8
  Top Layer w16: R120.2 2679.19,1425 2687.19,1417 2722.81,1417 2730.81,1425 R133.2 3008.82,1221.18 Pot13.1
NetPot13_3: Pot13.3 R134.1 R140.2 | length 261.7
  Top Layer w16: Pot13.3 3260,1220 3276.18,1236.18 R140.2 R134.1
NetPot14_1: Pot14.1 R132.2 | length 204.6
  Top Layer w16: R132.2 2158.82,351.18 2170,340 Pot14.1
NetQ3_2: Q3.2 R23.1 | length 120.7
  Top Layer w16: R23.1 1576.18,1778.82 1590,1765 Q3.2
NetQ3_3: Q3.3 R22.2 | length 117.6
  Top Layer w16: R22.2 1526.18,1710 1580,1710 1585,1715 Q3.3
NetQ103_2: Q103.2 R123.1 | length 118.7
  Top Layer w16: R123.1 2486.18,1738.82 2495,1730 Q103.2
NetQ103_3: Q103.3 R122.2 | length 117.6
  Top Layer w16: R122.2 2431.18,1675 2480,1675 2485,1680 Q103.3
NetR1_2: R1.2 R2.2 U2.6 | length 206
  Top Layer w16: R2.2 501.18,2175 U2.6
NetR4_2: R4.2 R9.1 R12.1 R13.1 R41.2 U3.12 | length 1186.5
  Top Layer w16: R41.2 475,1010 485,1000 1040,1000 1071.18,1031.18 R13.1@1071.18,1095.5 ; R13.1 R13.1@1071.18,1095.5 ; R4.2 R9.1 ; U3.12 1330,1065 1309.2,1085.8 1309.2,1120.8 1290,1140 1271.18,1140 1271.18,1106.18 1260.5,1095.5 R13.1@1071.18,1095.5
NetR5_1: R5.1 R6.2 R7.2 U2.10 | length 301
  Top Layer w16: U2.10 1103.82,2225 R6.2 R7.2
NetR7_1: R7.1 R8.2 U2.8 | length 504.8
  Top Layer w16: U2.8 930,2125 980,2175 1195,2175 ; R7.1 1195,2175 ; R8.2 1285,2160 1270,2175 1195,2175
NetR14_2: R14.2 U1.1 | length 438.8
  Top Layer w16: U1.1 1807.64,802.64 1832,827 1832,892 1848,908 1883,908 1900,925 1900,1143.82 R14.2
NetR15_2: R15.2 R16.2 U3.13 | length 264.5
  Top Layer w16: R16.2 1182,973.18 1182,977.81 1225,1020.81 1225,1035 1240,1050 1271.18,1050 1295,1050 1330,1015 U3.13
NetR16_1: R16.1 R17.2 R18.2 U3.14 | length 767.8
  Top Layer w16: R18.2 970,1203.82 970,1170 984.5,1155.5 1096.35,1155.5 1106.9,1166.05 1106.9,1195.13 1121.77,1210 1168.82,1210 R17.2 v1(1215,1230) ; v1(1225,960) R16.1 1276.18,965 U3.14
  Bottom Layer w16: v1(1215,1230) 1215,1190 1225,1180 v1(1225,960)
NetR17_1: R17.1 R19.1 U3.10 | length 631.4
  Top Layer w16: R17.1@1271.18,1218.82 R17.1 1290,1230 1309.2,1210.8 1309.2,1185.8 1330,1165 U3.10 1445,1165 1459.54,1179.54 1459.54,1484.54 1490,1515 R19.1
NetR21_1: R21.1 U3.6 | length 288.1
  Top Layer w16: R21.1 1505,1425 1495,1415 1495,1235 1515,1215 U3.6
NetR23_2: R23.2 R24.1 U3.7 | length 1066.8
  Top Layer w16: R24.1 R23.2 1728.82,1881.18 1745,1865 1745,1375 1700,1330 1575,1330 1559.49,1314.49 U3.7
NetR24_2: R24.2 R27.2 U3.5 | length 1620.2
  Top Layer w16: R27.2 R24.2 1366.18,1778.82 1350,1795 1350,1900 1375,1925 1721.77,1925 1770.88,1875.88 1771,1875.77 1771,1196 1745,1170 1665,1170 1660,1165 U3.5
NetR25_2: R25.2 R26.1 U3.3 | length 295.3
  Top Layer w16: U3.3 1605,1065 1620.8,1049.2 1620.8,1019.2 1635,1005 1665,1005 1680,990 R25.2 R26.1
NetR27_1: R27.1 R28.1 R29.1 R36.2 U3.1 U3.2 | length 1405.5
  Top Layer w16: R36.2 v1(1475,865) 1558.82,865 ; R27.1 v1(1435,1655) ; U3.2 1558.82,1014.33 1558.82,865 ; R28.1 1625,685 1610,700 1610,760 1595,775 R29.1 1558.82,865
  Bottom Layer w16: v1(1435,1655) 1435,940 1475,900 v1(1475,865)
NetR28_2: R28.2 R30.1 U1.4 | length 348.8
  Top Layer w16: 1558.82,635 U1.4
  Top Layer w24: R30.1 R28.2
NetR101_2: R101.2 R102.2 U102.6 | length 201
  Top Layer w16: R102.2 2081.18,2420 U102.6
NetR104_2: R104.2 R109.1 R112.1 R113.1 R141.2 U103.12 | length 2587.1
  Top Layer w16: R112.1 2190,1145 2204.2,1130.8 2204.2,1080.8 2220,1065 U103.12 v1(2345,1065) ; R109.1 R104.2 ; v1(3060,2315) 3060,2365 3056.18,2368.82 R104.2 ; R141.2@3135,2368.82 R141.2 R104.2
  Bottom Layer w16: v1(2345,1065) 2400,1065 2423,1088 2423,1287 2398,1312 2357.19,1312 2332,1337.19 2332,1372.81 2357.19,1398 2392.81,1398 2406.81,1384 3024,1384 3060,1420 v1(3060,2315)
NetR105_1: R105.1 R106.2 R107.2 U102.10 | length 301
  Top Layer w16: U102.10 2768.82,2470 R107.2
NetR107_1: R107.1 R108.2 U102.8 | length 504.8
  Top Layer w16: U102.8 2508.5,2370 2558.5,2420 2770,2420 ; R107.1 2770,2420 ; R108.2 2860,2405 2845,2420 2770,2420
NetR114_2: R114.2 U1.16 | length 387.2
  Top Layer w16: R114.2 1990,1148.82 1990,825 2012.36,802.64 U1.16
NetR115_2: R115.2 R116.2 U103.13 | length 270
  Top Layer w16: R116.2 2062.64,968.45 2115,1020.81 2115,1040 2130,1055 R115.2 2185,1055 2225,1015 U103.13
NetR116_1: R116.1 R117.2 R118.2 U103.14 | length 864.3
  Top Layer w16: R118.2 v1(1935,1340) ; R117.2 v1(2110,1235) ; v1@2115,965 v1(2120,965) R116.1 U103.14
  Bottom Layer w16: v1(1935,1340) 2089.19,1340 2110,1319.19 v1(2110,1235) 2150,1235 2165,1220 2165,980 2150,965 v1(2120,965)
NetR117_1: R117.1 R119.1 U103.10 | length 568.5
  Top Layer w16: R117.1 2185,1235 2204.2,1215.8 2204.2,1175.8 2215,1165 U103.10 2365,1165 2390,1140 2390,878.82 R119.1@2403.82,865
NetR121_1: R121.1 U103.6 | length 814
  Top Layer w16: R121.1 1888.82,1468.82 1905,1485 2200,1485 2225,1460 2225,1370 2239,1356 2265.77,1356 2326.82,1294.95 2326.82,1238.18 2350,1215 U103.6
NetR123_2: R123.2 R124.1 U103.7 | length 1462.3
  Top Layer w16: R124.1 R123.2 2479.41,1841.18 2504.23,1866 2655.77,1866 2705,1816.77 v1(2705,1460) ; v1(2380,1265) U103.7
  Bottom Layer w16: v1(2380,1265) 2340,1265 2306,1299 2306,1383.58 2346.42,1424 2403.58,1424 2417.58,1410 2690,1410 2705,1425 v1(2705,1460)
NetR124_2: R124.2 R127.2 U103.5 | length 1506.4
  Top Layer w16: R127.2 R124.2 2340,1775 2355,1790 2465,1790 2515,1840 2645,1840 2665,1820 2665,1495 2644.5,1474.5 2421.01,1474.5 2410.46,1463.95 2410.46,1380.35 2418,1372.81 2418,1332 2436.37,1313.63 2516.37,1313.63 2525,1305 2525,1180 2510,1165 U103.5
NetR125_2: R125.2 R126.1 U103.3 | length 342.2
  Top Layer w16: U103.3 2510,1065 2562.36,1012.64 R126.1
NetR127_1: R127.1 R128.1 R129.1 R136.2 U103.1 U103.2 | length 2171.8
  Top Layer w16: R128.1 2195,685 2210,700 2210,760 2225,775 R129.1 2450,775 2455,780 2455,964.49 U103.1 ; R127.1 2340,1505 2379.54,1465.46 2379.54,1386.05 2375,1381.51 v1(2375,1355) ; U103.2 U103.1 ; R136.2 U103.1
  Bottom Layer w16: v1(2375,1355) 2420,1355 2455,1320 v1@2455,780
  other v1: 2455,775
NetR128_2: R128.2 R130.1 U1.13 | length 350.9
  Top Layer w16: U1.13 2256.18,635 2261.18,630 ; R130.1 R128.2
NetU4_1: U4.1 U4.5 U4.8
NetU104_1: U104.1 U104.5 U104.8
VCC: C201.1 C202.1 C203.1 C204.1 C205.1 C206.1 C207.1 R5.2 R10.1 R25.1 R37.2 R39.1 R105.2 R110.1 R125.1 R137.2 R139.1 U1.11 U2.4 U3.4 U4.7 U102.4 U103.4 U104.7 | length 4511
  Top Layer w16: v1(530,2275) U2.4 ; R39.1 1031.18,448.82 R37.2 1030,485 1017.5,497.5 982.5,497.5 965,515 v1(965,605) C204.1 966.85,660 U4.7 ; U3.4 C203.1@1680,1115 ; R25.1 C203.1@1680,1115 ; C203.1@1680,1121.85 C203.1@1680,1115 ; v1(1770,1115) C203.1@1680,1115 ; v1(1875,865) C201.1@1935,865 ; C201.1 C201.1@1935,865 ; U1.11 1955,535 1935,555 C201.1@1935,865 ; v1(2110,2520) U102.4 ; U103.4 2576.85,1115 2579.49,1112.36 R125.1 v1(2680,1180) ; C206.1@2878.15,775 C206.1 C206.1@2881.85,775 ; R139.1 R137.2 2946.18,588.82 2931.64,603.36 2901.64,603.36 2895,610 v1(2895,705) 2895,761.85 C206.1@2881.85,775 ; U104.7 C206.1@2881.85,775
  Bottom Layer w16: v1(965,605) 1845,605 1875,635 v1(1875,865) 1790,865 1770,885 v1(1770,1115) 1770,1175 ; v1(2680,1180) 2875,1180 2895,1160 v1(2895,705)
pads on no net: Pot2.1 Pot7.2 Pot9.1 Pot14.2 Q2.3 Q102.3 U1.2 U1.7 U1.8 U1.9 U1.10 U1.15

## Polygon pours and split planes (outlines as drawn)
GND on Top Layer "GND_L01_P000" (solid, pour order 0): 0,5 0,3930 3935,3930 3935,0

## Silkscreen, mask and mechanical layers (free items; w line width, h text height)
Board Edge:
  the board outline again, w6